# Altium PCB PCB_NixieClock Back_2021-09-06.pcbdoc
Units mil, origin at the board's own origin, x right, y up, seen from the top; angles counter-clockwise.
Board outline 5705 x 3185 mil, 2 copper layers (Top Layer, Bottom Layer); 11 components, 44 nets, 91 pads, 6 vias.
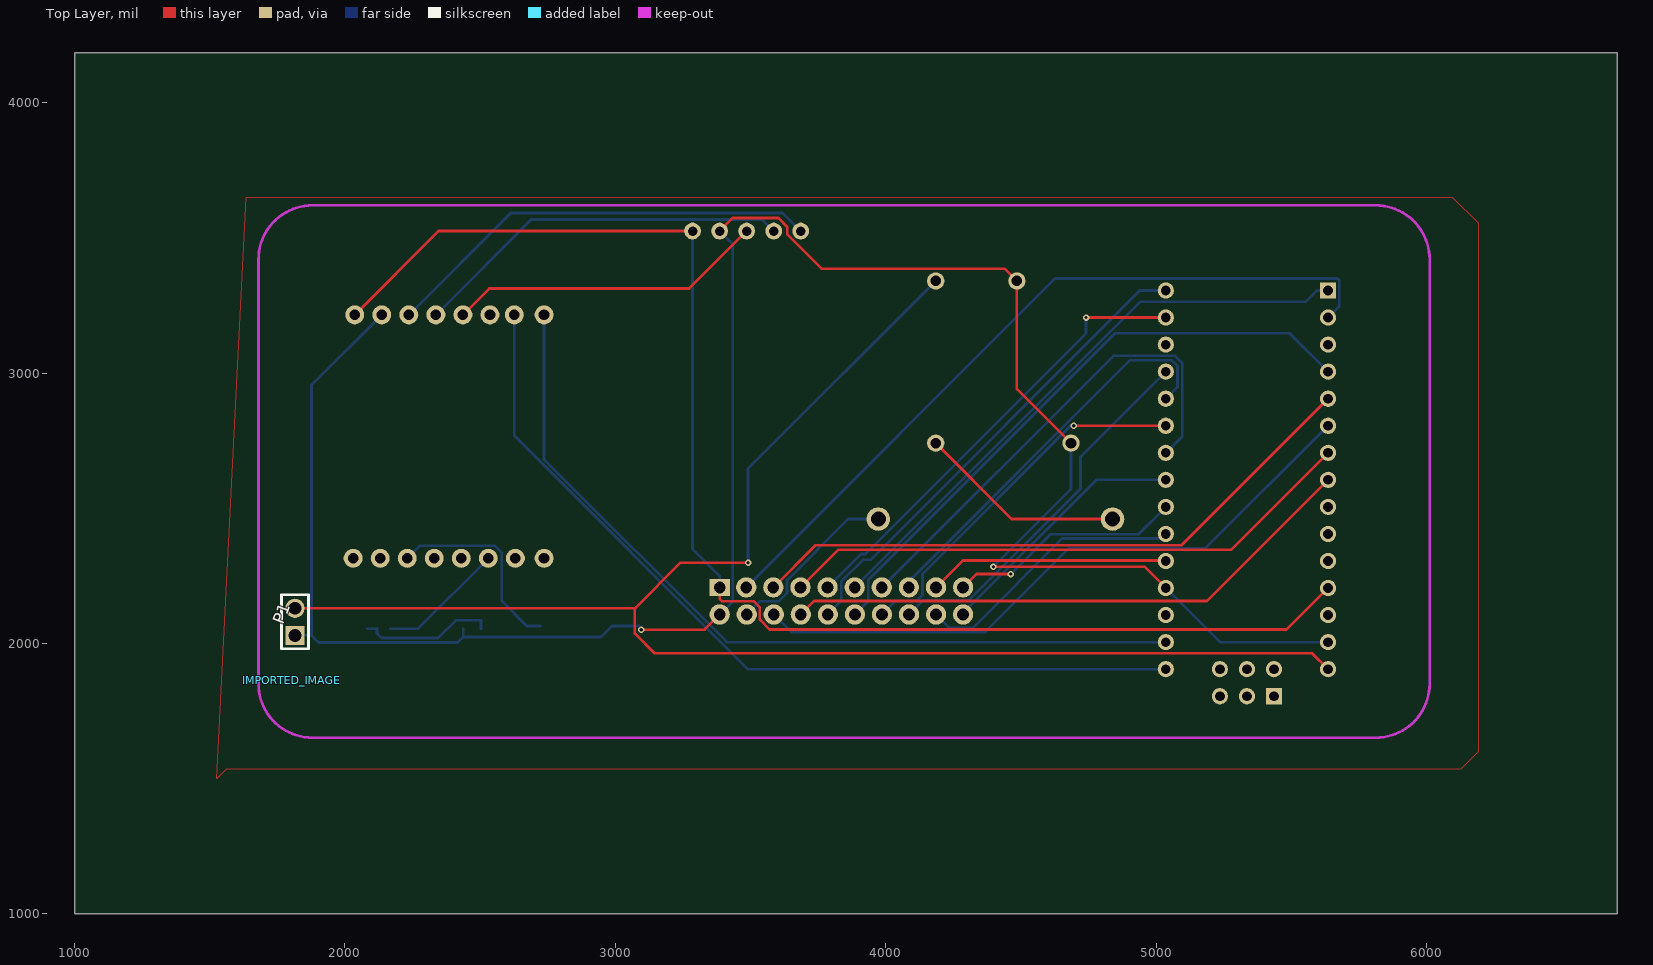
[diagram p0: Top Layer view]
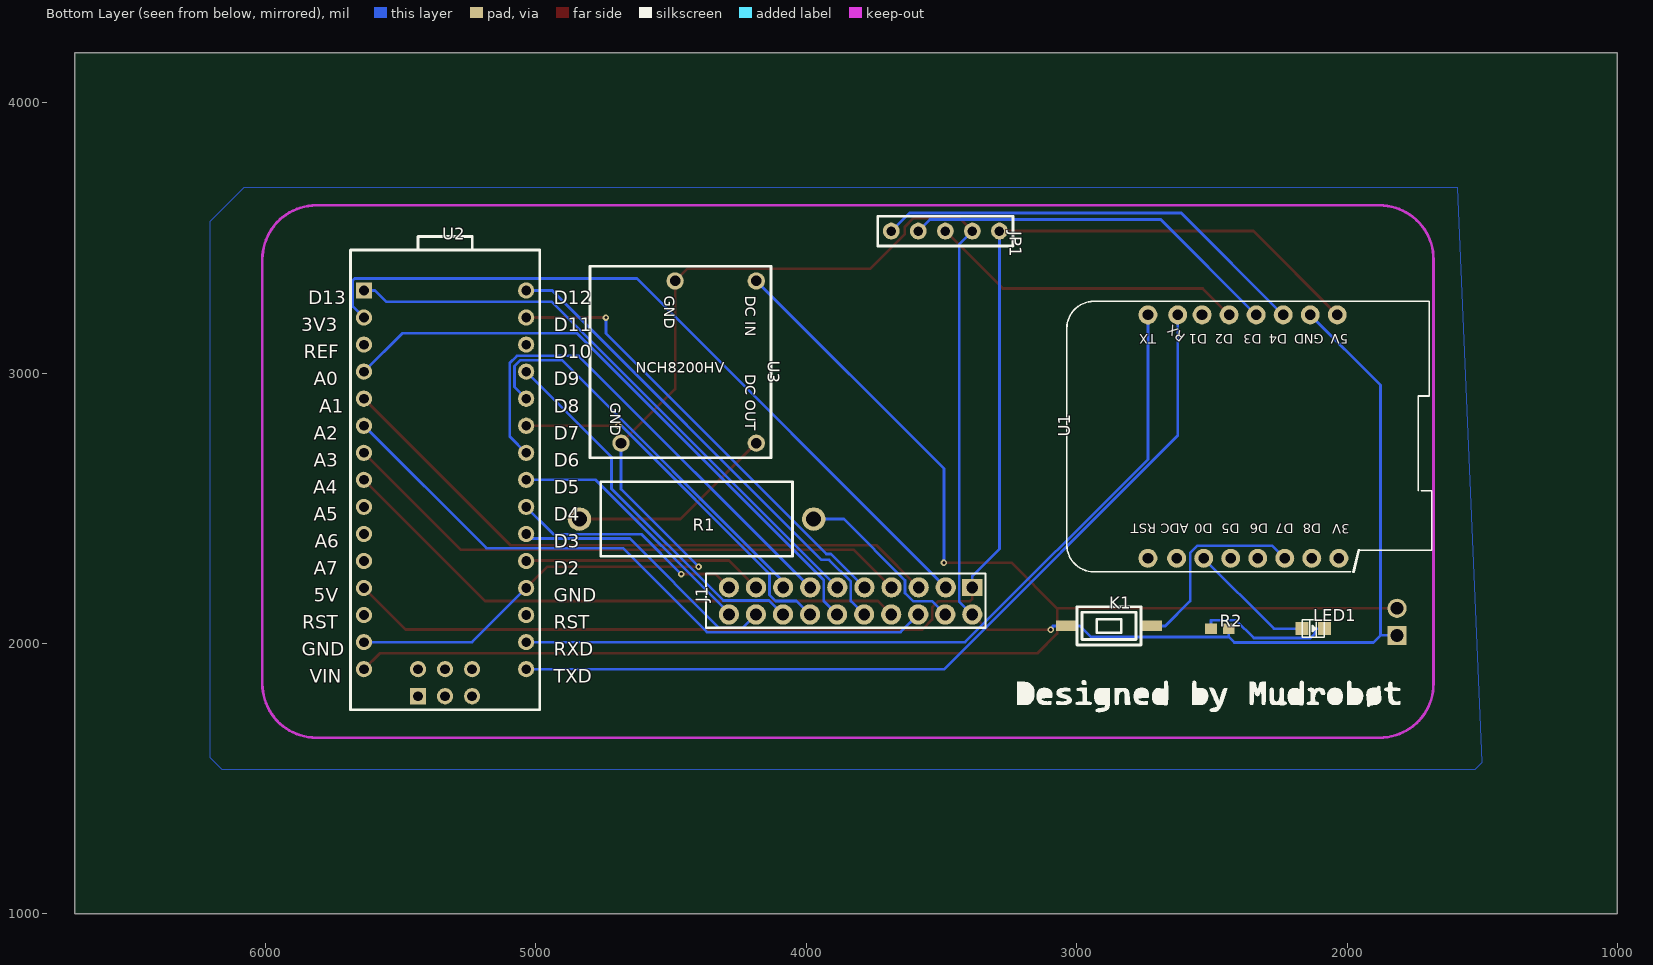
[diagram p1: Bottom Layer view, seen from below]

## Layer stack, top to bottom
Top Layer: signal copper (thickness not stored)
Dielectric: dielectric 12.6, FR-4, Dk 4.8
Bottom Layer: signal copper (thickness not stored)

## Board outline
6705,1000 1000,1000 1000,4185 6705,4185

## Components (designator, comment, footprint, x,y, rotation, side; value= is the part's Value field where it differs from the comment)
IMPORTED_IMAGE "IMPORTED_IMAGE" IMPORTED_IMAGE 1802.28,1864.16 r0 top
J1 "2.54MM,2×10双排针" 2*10P 3795.45,2182.24 r270 bottom
JP1 "1*5P" 1*5P 3285,3525 r90 bottom
K1 "K0" SW-SMD_2PIN-L6.15-W3.70-L 2880,2065 r0 bottom
LED1 "17-21/BHC-AP1Q2/3T" LED_0805 2125,2055 r0 bottom
P1 "HEADER-MALE-2.54_2" 1*2P-P2.54插针 1815,2080 r90 top
R1 "10" RES-TH_BD7.0-L18.0-P22.00-D0.5 4405,2460 r0 bottom
R2 "510" 0603-RES 2470,2055 r0 bottom
U1 "MiniD1-ESP8266" ESP8266-DI-MINI 2380,2765 r270 bottom
U2 "Arduino Nano" "ARDUINO NANO" 5335,2605 r0 bottom
U3 "NCH8200HV" NCH8200HV升压 4130,3395 r90 bottom

## Footprints (in the part's own frame and the unit in brackets; to place one, negate y for a bottom-side part, rotate by r counter-clockwise, add the part's x,y. Pads: shape width x height; smd on the part's side, far side on the other; paste and mask are expansions set on the pad)
1*2P-P2.54插针 [mm]
  rect 1.8x1.8 hole 1.2: 1(-1.27,0)
  round 1.8 hole 1.2: 2(1.27,0)
  silkscreen extent -2.54,-1.27 2.54,1.27
1*5P [mil]
  round 62 hole 35: 1(0,400) 2(0,300) 3(0,200) 4(0,100) 5(0,0)
  silkscreen extent -55,-50 55,450
2*10P [mm]
  rect 1.575x1.9 hole 1.1: 1(-0.635,10.414)
  round 1.9 hole 1.1: 2(1.905,10.414) 3(-0.635,7.919) 4(1.905,7.874) 5(-0.635,5.373) 6(1.905,5.334) 7(-0.635,2.828) 8(1.905,2.794) 9(-0.635,0.282) 10(1.905,0.254) 11(-0.635,-2.263) 12(1.905,-2.286) 13(-0.635,-4.809) 14(1.905,-4.826) 15(-0.635,-7.355) 16(1.905,-7.366) 17(-0.635,-9.9) 18(1.905,-9.906) 19(-0.635,-12.446) 20(1.905,-12.446)
  silkscreen extent -1.93,-14.6 3.15,11.66
0603-RES [mil]
  rect 43.3x39.4 smd: 1(33,0) 2(-33,0)
"ARDUINO NANO" [mil]
  rect 60x60 hole 36: 1(300,-700) 31(100,800)
  round 60 hole 36: 2(300,-600) 3(300,-500) 4(300,-400) 5(300,-300) 6(300,-200) 7(300,-100) 8(300,0) 9(300,100) 10(300,200) 11(300,300) 12(300,400) 13(300,500) 14(300,600) 15(300,700) 16(-300,700) 17(-300,600) 18(-300,500) 19(-300,400) 20(-300,300) 21(-300,200) 22(-300,100) 23(-300,0) 24(-300,-100) 25(-300,-200) 26(-300,-300) 27(-300,-400) 28(-300,-500) 29(-300,-600) 30(-300,-700) 32(0,800) 33(-100,800) 34(-100,700) 35(0,700) 36(100,700)
  silkscreen extent -350,-900 350,850
ESP8266-DI-MINI [mil]
  round 70 hole 39.4: 1(450,-356) 2(450,-250) 3(450,-150) 4(450,-50) 5(450,50) 6(450,150) 7(450,250) 8(450,350) 9(-450,344) 10(-450,244) 11(-450,144) 12(-450,44) 13(-450,-56) 14(-450,-156) 15(-450,-246) 16(-450,-356)
  silkscreen extent -500,-656 500,694
IMPORTED_IMAGE [mil]
LED_0805 [mil]
  rect 48x48 smd: 1(42,0) 2(-42,0)
  silkscreen extent -40,-32 40,32
NCH8200HV升压 [mm]
  round 1.624 hole 1: 1(-1.38,1.38) 2(-1.38,9) 3(-16.62,14.08) 4(-16.62,1.38)
  silkscreen extent -18,0 0,17
RES-TH_BD7.0-L18.0-P22.00-D0.5 [mm]
  round 2.2 hole 1.4: 1(11,0) 2(-11,0)
  silkscreen extent -9,-3.5 9,3.5
SW-SMD_2PIN-L6.15-W3.70-L [mm]
  rect 2x1 smd: 1(4,0) 2(-4,0)
  silkscreen extent -3,-1.8 3,1.8

## Via types
v1: diameter 24.02, hole 12.01, Top Layer to Bottom Layer, 6 vias

## Nets (pads, with @x,y where several pads share a name; then routed paths per layer and width w, separated by ;. In a path a pad name is that pad's centre, name@x,y a point inside that pad or via, vN(x,y) a via of type N, cw(c..) or ccw(c..) an arc to the next point about the centre after c; other vN are vias at no path point)
1: U1.15 U2.16 | length 3213.5
  Bottom Layer w10: U1.15 2626,2768 3489,1905 U2.16
2: U1.16 U2.17 | length 3113
  Bottom Layer w10: U1.16 2736,2681.02 3412.02,2005 U2.17
5V: J1.1 JP1.5 U1.9 U2.12 | length 5165.4
  Top Layer w10: U1.9 2346,3525 JP1.5 ; J1.1 3385.45,2165.17 3394.27,2156.35 3510.85,2156.35 3533.93,2133.27 3533.93,2088.11 3570.44,2051.6 5481.6,2051.6 U2.12
  Bottom Layer w10: JP1.5 3285,2349.76 3385.45,2249.31 J1.1
CLK: JP1.3 U1.13 | length 1177.4
  Top Layer w10: U1.13 2533.62,3312.62 3272.62,3312.62 JP1.3
DAT: JP1.2 U1.12 | length 1412.7
  Bottom Layer w10: U1.12 2688.63,3567.63 3542.37,3567.63 JP1.2
GND: J1.2 JP1.4 K1.1 P1.1 R2.2 U1.10 U2.14 U2.19 U3.2 U3.3 | length 8263.4
  Top Layer w10: v1(3095.72,2050.93) 3329.14,2050.93 J1.2 ; JP1.4 3433.55,3573.55 3602.24,3573.55 3635,3540.79 3635,3514.48 3764.12,3385.36 4439.64,3385.36 U3.2 4484.33,2940.67 U3.3 ; v1(4397.75,2283.95) 4956.05,2283.95 U2.19
  Bottom Layer w10: P1.1 1861.5,2030 1876.33,2030 ; U1.10 1876.33,2955.33 1876.33,2030 ; R2.2 2437,2024.23 ; v1(3095.72,2050.93) 3087.92,2058.73 3087.92,2065 K1.1 2987.04,2065 2946.27,2024.23 2437,2024.23 ; JP1.4 3433.93,3476.07 3433.93,2155.72 J1.2 ; v1(4397.75,2283.95) 4684.33,2570.53 U3.3 ; U2.19 5235,2005 U2.14 ; 1876.33,2030 1902.63,2003.7 2416.47,2003.7 2437,2024.23
H1_A: J1.9 U2.29 | length 1698.5
  Top Layer w10: v1(4739.99,3205) U2.29
  Bottom Layer w10: J1.9 3908.15,2331.05 3925.07,2331.05 4739.99,3145.97 v1(4739.99,3205)
H1_B: J1.10 U2.30 | length 1788
  Bottom Layer w10: J1.10 3834.46,2156.25 3834.46,2228.54 3915.18,2309.26 3942.95,2309.26 4938.69,3305 U2.30
H1_C: J1.11 U2.1 | length 2205.1
  Bottom Layer w10: J1.11 4941.25,3263.93 5552.86,3263.93 5593.93,3305 U2.1
H1_D: J1.12 U2.4 | length 2284.9
  Bottom Layer w10: J1.12 3934.67,2156.46 3934.67,2234.58 4847.16,3147.07 5492.93,3147.07 U2.4
H2_A: J1.5 U2.5 | length 2340.1
  Top Layer w10: J1.5 3739.85,2363.2 5093.2,2363.2 U2.5
H2_B: J1.6 U2.6 | length 2392.7
  Bottom Layer w10: J1.6 3650.75,2041.94 4366.87,2041.94 4677.33,2352.4 5182.4,2352.4 U2.6
H2_C: J1.7 U2.7 | length 2157.1
  Top Layer w10: J1.7 3823.99,2347.11 5277.11,2347.11 U2.7
H2_D: J1.8 U2.8 | length 2155.7
  Top Layer w10: J1.8 3734.9,2156.69 5186.69,2156.69 U2.8
HV: J1.4 R1.2 | length 660.2
  Bottom Layer w10: J1.4 3534.71,2156.5 3604.38,2156.5 3634.01,2186.13 3634.01,2233.31 3860.7,2460 R1.2
KEY: K1.2 U1.6 | length 738.6
  Bottom Layer w10: U1.6 2276.73,2361.73 2552.61,2361.73 2580,2334.34 2580,2157.08 2672.08,2065 K1.2
LED0: J1.3 U2.2 | length 2823.1
  Bottom Layer w10: J1.3 4625.6,3349.17 5670.06,3349.17 5676.08,3343.15 5676.08,3246.08 U2.2
LED1: LED1.1 U1.3 | length 470.7
  Bottom Layer w10: LED1.1 2270,2055 U1.3
M1_A: J1.17 U2.20 | length 891.9
  Top Layer w10: J1.17 4285.02,2307.03 5032.97,2307.03 U2.20
M1_B: J1.18 U2.21 | length 1013.7
  Bottom Layer w10: J1.18 4234.66,2058.03 4321.89,2058.03 4651.72,2387.86 5017.86,2387.86 U2.21
M1_C: J1.19 U2.22 | length 872.9
  Top Layer w10: J1.19 4334.78,2256.57 v1(4461.99,2256.57)
  Bottom Layer w10: v1(4461.99,2256.57) 4609.38,2403.96 4933.96,2403.96 U2.22
M1_D: J1.20 U2.23 | length 958.9
  Bottom Layer w10: J1.20 4285.45,2112.67 4777.78,2605 U2.23
M2_A: J1.13 U2.24 | length 1834.3
  Bottom Layer w10: J1.13 4841.31,3063.77 5069.53,3063.77 5095.73,3037.57 5095.73,2765.73 U2.24
M2_B: J1.14 U2.25 | length 1384.1
  Top Layer w10: v1(4694.22,2805) U2.25
  Bottom Layer w10: J1.14 4035.23,2157.02 4112.46,2157.02 4135.12,2179.68 4135.12,2257.35 4682.77,2805 v1(4694.22,2805)
M2_C: J1.15 U2.26 | length 1502.6
  Bottom Layer w10: J1.15 4085.01,2230 4902.68,3047.67 5056.38,3047.67 5078.37,3025.68 5078.37,2948.37 U2.26
M2_D: J1.16 U2.27 | length 1390.2
  Bottom Layer w10: J1.16 4136.97,2158.76 4306.2,2158.76 4719.6,2572.16 4719.6,2689.6 U2.27
R2_1: LED1.2 R2.1 | length 502.8
  Bottom Layer w10: LED1.2 2118.07,2055 2118.07,2037.46 2135.6,2019.93 2344.67,2019.93 2410.51,2085.77 2503,2085.77 R2.1
RST: JP1.1 U1.11 | length 1632.9
  Bottom Layer w10: U1.11 2612.96,3591.96 3618.04,3591.96 JP1.1
U1_1: U1.1
U1_2: U1.2
U1_4: U1.4
U1_5: U1.5
U1_7: U1.7
U1_8: U1.8
U1_14: U1.14
U2_3: U2.3
U2_9: U2.9
U2_10: U2.10
U2_11: U2.11
U2_13: U2.13
U2_18: U2.18
U2_28: U2.28
U3_4: R1.1 U3.4 | length 770
  Top Layer w10: U3.4 4465,2460 R1.1
VIN: P1.2 U2.15 U3.1 | length 5786.1
  Top Layer w10: P1.2 3071.57,2130 ; v1(3490.51,2298.69) 3240.26,2298.69 3071.57,2130 ; U2.15 5576.08,1963.92 3144.22,1963.92 3071.57,2036.57 3071.57,2130
  Bottom Layer w10: v1(3490.51,2298.69) 3490.51,2646.85 U3.1
pads on no net: U2.31 U2.32 U2.33 U2.34 U2.35 U2.36

## Polygon pours and split planes (outlines as drawn)
GND on Top Layer (solid): 1635,3650 6095,3650 6190,3555 6190,1600 6125,1535 1560,1535 1525,1500
GND on Bottom Layer (solid): 1590,3685 6080,3685 6205,3560 6205,1580 6160,1535 1525,1535 1500,1560

## Keep-outs
Keep-Out Layer:
  lines w10: 1680,1851.5 ccw(c1880,1851.5) 1880,1651.5 ; 1680,3420 cw(c1880,3420) 1880,3620 ; 5810.71,1651.5 ccw(c5810.71,1851.5) 6010.71,1851.5 ; 5810.71,3620 cw(c5810.71,3420) 6010.71,3420

## Text inside footprints (layer, text, board x,y; h text height)
U1: Bottom Overlay "RST" at 2706,2442.5 h35 r180; Bottom Overlay "ADC" at 2586,2442.5 h35 r180; Bottom Overlay "D0" at 2496,2442.5 h35 r180; Bottom Overlay "D5" at 2396,2442.5 h35 r180; Bottom Overlay "D6" at 2291,2442.5 h35 r180; Bottom Overlay "D7" at 2196,2442.5 h35 r180; Bottom Overlay "D8" at 2096,2442.5 h35 r180; Bottom Overlay "3V" at 1990,2441.4 h35 r180; Bottom Overlay "TX" at 2706,3142.5 h35 r180; Bottom Overlay "RX" at 2595.23,3138.79 h35 r218; Bottom Overlay "D2" at 2421,3142.5 h35 r180; Bottom Overlay "D1" at 2516,3142.5 h35 r180; Bottom Overlay "D3" at 2316,3142.5 h35 r180; Bottom Overlay "D4" at 2221,3142.5 h35 r180; Bottom Overlay "GND" at 2086,3142.5 h35 r180; Bottom Overlay "5V" at 1996,3142.5 h35 r180
U2: Bottom Overlay "VIN" at 5835,1854 h50; Bottom Overlay "GND" at 5864.5,1954 h50; Bottom Overlay "RST" at 5862.3,2054 h50; Bottom Overlay "5V" at 5820,2154 h50; Bottom Overlay "A7" at 5820,2254 h50; Bottom Overlay "A6" at 5817.7,2354 h50; Bottom Overlay "A5" at 5820,2454 h50; Bottom Overlay "A4" at 5822.3,2554 h50; Bottom Overlay "A3" at 5820,2654 h50; Bottom Overlay "A2" at 5820,2754 h50; Bottom Overlay "A1" at 5799.5,2854 h50; Bottom Overlay "A0" at 5820,2954 h50; Bottom Overlay "REF" at 5857.7,3054 h50; Bottom Overlay "3V3" at 5866.8,3154 h50; Bottom Overlay "D13" at 5841.8,3254 h50; Bottom Overlay "TXD" at 4933,1854 h50; Bottom Overlay "RXD" at 4933,1954 h50; Bottom Overlay "RST" at 4933,2054 h50; Bottom Overlay "GND" at 4933,2154 h50; Bottom Overlay "D2" at 4933,2254 h50; Bottom Overlay "D3" at 4933,2354 h50; Bottom Overlay "D4" at 4933,2454 h50; Bottom Overlay "D5" at 4933,2554 h50; Bottom Overlay "D6" at 4933,2654 h50; Bottom Overlay "D7" at 4933,2754 h50; Bottom Overlay "D8" at 4933,2854 h50; Bottom Overlay "D9" at 4933,2954 h50; Bottom Overlay "D10" at 4933,3054 h50; Bottom Overlay "D11" at 4933,3154 h50; Bottom Overlay "D12" at 4933,3254 h50
U3: Bottom Overlay "DC IN" at 4224.69,3285 h39.37 r90; Bottom Overlay "DC OUT" at 4224.69,2995 h39.37 r90; Bottom Overlay "GND" at 4524.69,3285 h39.37 r90; Bottom Overlay "GND" at 4724.69,2890.2 h39.37 r90